# Altium PCB boltanka.PcbDoc
Units mm, origin at the board's own origin, x right, y up, seen from the top; angles counter-clockwise.
Board outline 48 x 25 mm, 2 copper layers (Top Layer, Bottom Layer), stack 1.071 mm thick; 36 components, 23 nets, 116 pads, 0 vias.
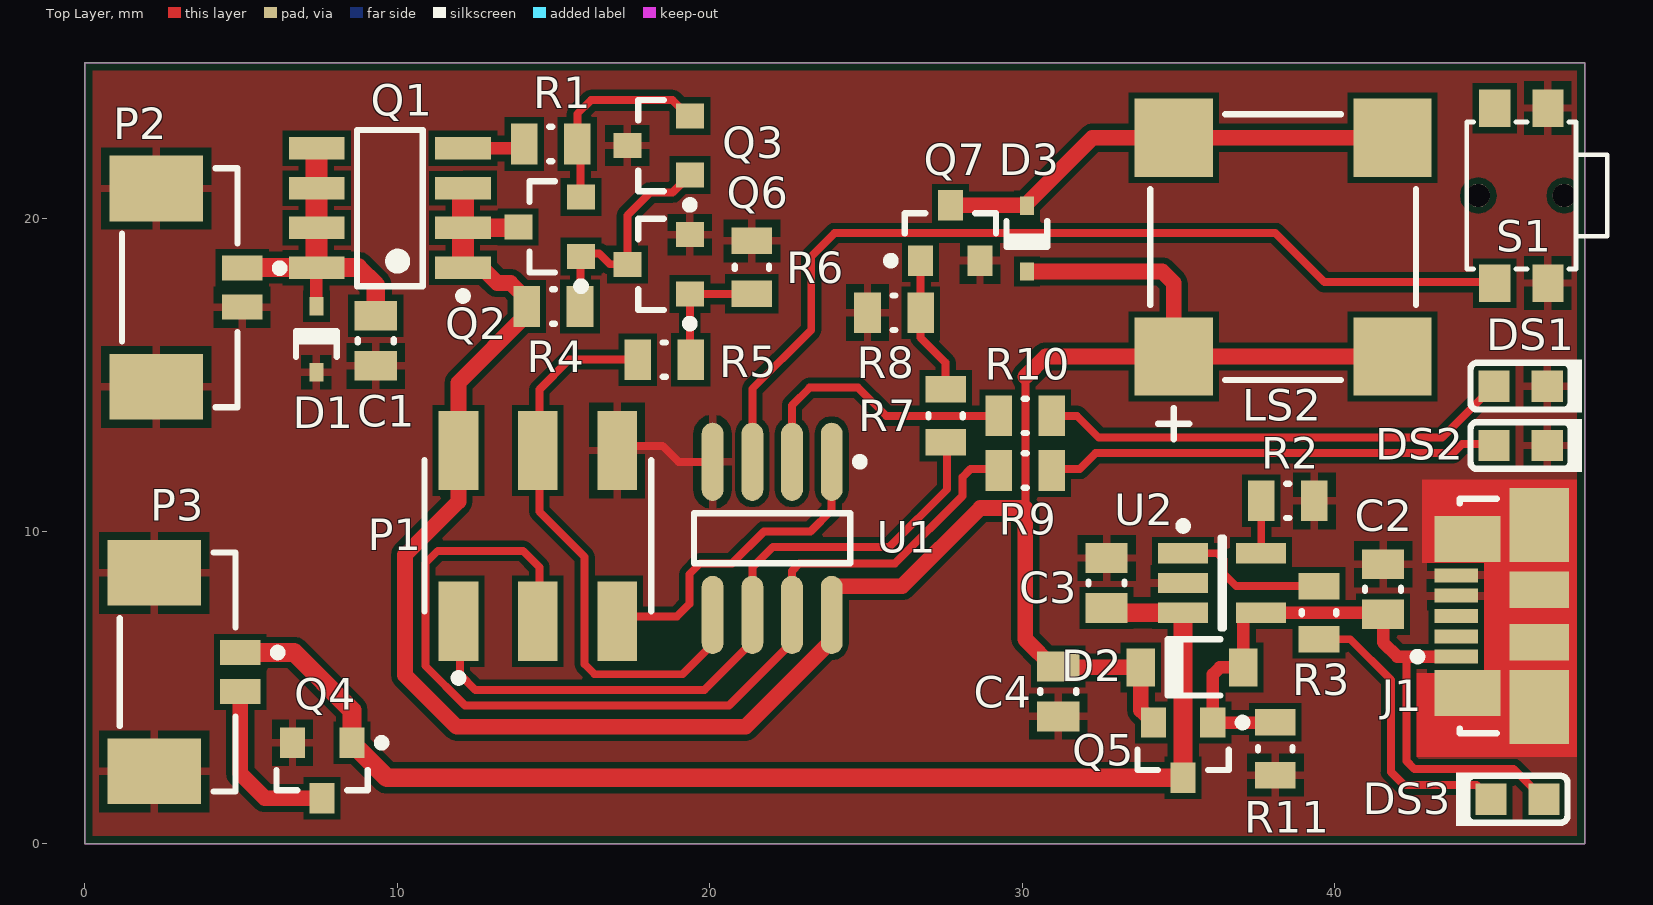
[diagram p0: Top Layer view]
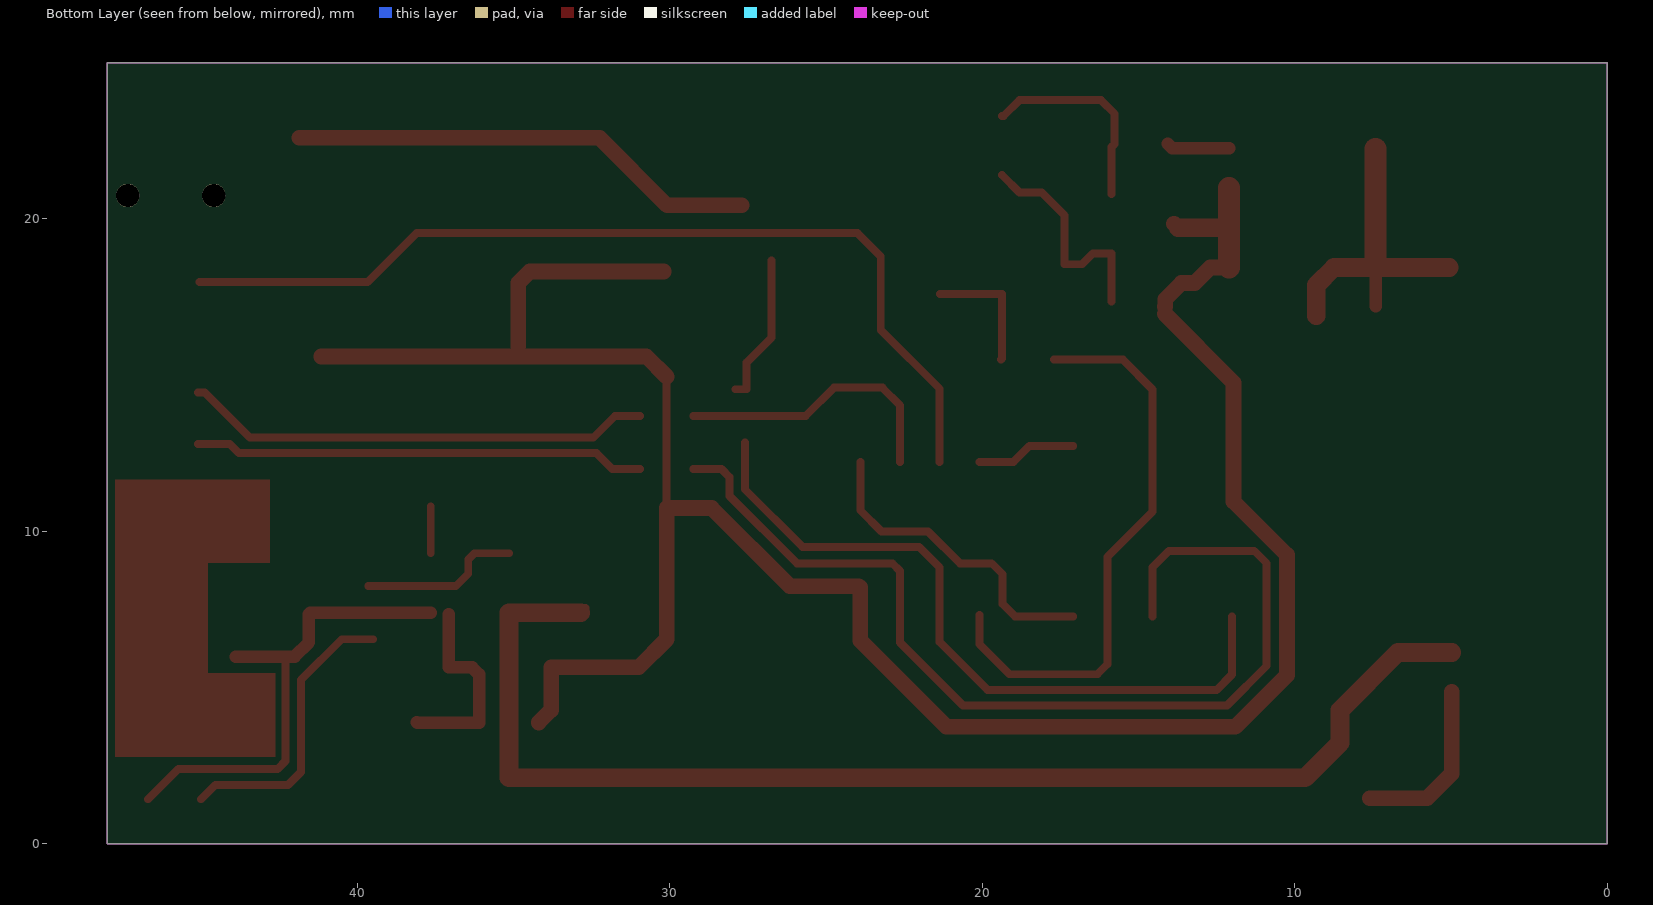
[diagram p1: Bottom Layer view, seen from below]

## Layer stack, top to bottom
Top Solder: solder mask 0.0102, Solder Resist, Dk 3.5
Top Layer: signal copper 0.0356
Dielectric 1: dielectric 1, FR-4, Dk 4.8
Bottom Layer: signal copper 0.0356
Bottom Solder: solder mask 0.0102, Solder Resist, Dk 3.5

## Board outline
0,0 0,25 48,25 48,0

## Design rules (kind name [scope] priority, off if disabled: settings)
Clearance [All] p1: gap=0.2 ignorepadtopadclearanceinfootprint=FALSE
PolygonConnect [All] p1: connectstyle=Relief reliefconductorwidth=0.254 reliefentries=4 polygonreliefangle="90 Angle" airgapwidth=0.254
RoutingVias [All] p1: holewidth=0.711 width=1.27 viastyle="Through Hole" minholewidth=0.711 minwidth=1.27 maxholewidth=0.711 maxwidth=1.27
SolderMaskExpansion [All] p1: expansion=0.102
Width [All] p1: maxlimit=1 minlimit=0.2 preferedwidth=0.3
30 further rules are at their usual default settings.

## Components (designator, comment, footprint, x,y, rotation, side; value= is the part's Value field where it differs from the comment)
C1 "CAP 10uF 6.3V 0805(2012)" CAPC0805(2012)100_L 9.314,16.1 r90 top value=10uF
C2 "CAP 10uF 6.3V 0805(2012)" CAPC0805(2012)100_L 41.55,8.15 r270 top value=10uF
C3 "CAP 10uF 6.3V 0805(2012)" CAPC0805(2012)100_L 32.7,8.35 r270 top value=10uF
C4 "CAP 10uF 6.3V 0805(2012)" CAPC0805(2012)100_L 31.153,4.879 r90 top value=10uF
D1 "BAT42WS-7-F" DIOD-SOD323-2_V 7.414,16.15 r90 top
D2 "MBR0540-TP" MCC-SOD123_V 35.438,5.65 r180 top
D3 "BAT42WS-7-F" DIOD-SOD323-2_V 30.15,19.373 r270 top
DS1 "KP-1608MGC" KING-0603LED_GREEN_V 45.95,14.65 r180 top
DS2 "KP-1608SECK" KING-0603LED_ORANGE_V 45.95,12.75 r180 top
DS3 "KP-1608MGC" KING-0603LED_GREEN_V 45.85,1.429 r0 top
J1 "47346-0001" MOLX-47346-0001-5_V 46.35,7.294 r90 top
LS2 "KSSGJ4B20" KINGS-KSSGJ4B20_V 38.35,19.1 r90 top
P1 "95278-101A06LF" AMPM-95278-101A06LF_V 14.5,9.861 r0 top
P2 "53398-0271" MOLX-53398-0271_V 3.664,17.8 r270 top
P3 "53398-0271" MOLX-53398-0271_V 3.6,5.5 r270 top
Q1 "IRF7404PBF" INF-SOIC-8_V 9.764,20.35 r180 top
Q2 "BC817-25LT1G" ONSC-SOT-23-3-318-08_V 14.883,19.75 r180 top
Q3 "BC807-25LT1G" ONSC-SOT-23-3-318-08_V 18.364,22.35 r180 top
Q4 "IRLML2502TRPBF" INTR-SOT-23-3_V 7.6,2.35 r180 top
Q5 "IRLML6402TRPBF" INTR-SOT-23-3_V 35.15,3 r180 top
Q6 "BC817-25LT1G" ONSC-SOT-23-3-318-08_V 18.364,18.55 r180 top
Q7 "IRLML2502TRPBF" INTR-SOT-23-3_V 27.7,19.55 r0 top
R1 "100R 1% 0805(2012)" RESC0805(2012)_L 14.914,22.4 r180 top value="100.00 Ohm"
R2 "1K5 5% 0805(2012)" RESC0805(2012)_L 38.5,10.977 r0 top value="1500.00 Ohm"
R3 "1K5 5% 0805(2012)" RESC0805(2012)_L 39.5,7.4 r90 top value="1500.00 Ohm"
R4 "1K5 5% 0805(2012)" RESC0805(2012)_L 15,17.2 r180 top value="1500.00 Ohm"
R5 "1K5 5% 0805(2012)" RESC0805(2012)_L 18.55,15.5 r0 top value="1500.00 Ohm"
R6 "100K 5% 0805(2012)" RESC0805(2012)_L 21.35,18.45 r270 top value="100000.00 Ohm"
R7 "1K5 5% 0805(2012)" RESC0805(2012)_L 27.55,13.7 r90 top value="1500.00 Ohm"
R8 "100K 5% 0805(2012)" RESC0805(2012)_L 25.9,17 r0 top value="100000.00 Ohm"
R9 "1K5 5% 0805(2012)" RESC0805(2012)_L 30.1,11.95 r0 top value="1500.00 Ohm"
R10 "1K5 5% 0805(2012)" RESC0805(2012)_L 30.1,13.7 r0 top value="1500.00 Ohm"
R11 "1K5 5% 0805(2012)" RESC0805(2012)_L 38.1,3.05 r90 top value="1500.00 Ohm"
S1 "436331045822" 4363x10458xx 45.975,20.75 r90 top
U1 "ATtiny13V-10SSU" S8S1_M 22,9.779 r270 top
U2 "LTC4054ES5-4.2#PBF" LT-S5-5-TSOT-23_M 36.4,8.35 r0 top

## Footprints (in the part's own frame and the unit in brackets; to place one, negate y for a bottom-side part, rotate by r counter-clockwise, add the part's x,y. Pads: shape width x height; smd on the part's side, far side on the other; paste and mask are expansions set on the pad)
4363x10458xx [mm] "3.5x4.7 mm SMD side push"
  rect 1.2x1 smd: 1(2.8,0.85) 2(2.8,-0.85) 3(-2.8,0.85) 4(-2.8,-0.85)
  round 0.75 hole 0.75 unplated: M1(0,1.375) M2(0,-1.375)
  silkscreen extent -2.35,-2.75 2.35,1.75, body extent -3.2,-2.75 3.2,1.75, height 1.67
AMPM-95278-101A06LF_V [mm] "SMD, 6-Leads, Body 7.26x4.83mm, Pitch 2.54mm"
  rect 1.27x2.54 smd: 1(-2.54,-2.73) 2(-2.54,2.73) 3(0,-2.73) 4(0,2.73) 5(2.54,-2.73) 6(2.54,2.73)
  silkscreen extent -3.63,-4.67 3.63,2.41, body extent -3.61,-3.64 3.61,3.64, height 9.71
CAPC0805(2012)100_L [mm] "Chip Capacitor, Body 2.0x1.2mm, Height 1.0mm, IPC High Density"
  rect 0.95x1.35 smd: 1(-0.8,0) 2(0.8,0)
  silkscreen extent -0.05,-0.58 0.05,0.58, body extent -1.1,-0.72 1.1,0.72, height 1
DIOD-SOD323-2_V [mm] "SOD-323, 2-Leads, Body 1.7x1.3mm, Lead Span 2.5mm"
  rect 0.59x0.45 smd: 1(-1.055,0) 2(1.055,0)
  silkscreen extent -0.56,-0.65 0.26,0.65, body extent -0.85,-0.65 0.85,0.65, height 1.2
INF-SOIC-8_V [mm] "SOIC, 8-Leads, Body 5x4mm, Pitch 1.27mm"
  rect 1.78x0.72 smd: 1(-2.34,1.905) 2(-2.34,0.635) 3(-2.34,-0.635) 4(-2.34,-1.905) 5(2.34,-1.905) 6(2.34,-0.635) 7(2.34,0.635) 8(2.34,1.905)
  silkscreen extent -2.47,-2.5 1.05,2.94, body extent -3,-2.5 3,2.5, height 1.75
INTR-SOT-23-3_V [mm] "SOT23, 3-Leads, Body 2.92x1.3mm, Pitch 1.9mm"
  rect 0.802x0.972 smd: 1(-0.95,-0.885) 2(0.95,-0.885) 3(0,0.885)
  silkscreen extent -2.03,-1.01 1.46,0.64, body extent -1.46,-0.65 1.46,0.65, height 1.12
KING-0603LED_GREEN_V [mm] "SMT LED, 2-Leads, Body 1.6x0.8mm (0603-Size)"
  rect 1x1 smd paste+0 mask+0: 1(0.85,0) 2(-0.85,0)
  silkscreen extent -1.97,-0.85 1.6,0.85, body extent -0.92,-0.53 1.09,0.53, height 1.1
KING-0603LED_ORANGE_V [mm] "SMT LED, 2-Leads, Body 1.6x0.8mm (0603-Size)"
  rect 1x1 smd paste+0 mask+0: 1(0.85,0) 2(-0.85,0)
  silkscreen extent -1.97,-0.85 1.6,0.85, body extent -0.92,-0.53 1.09,0.53, height 1.1
KINGS-KSSGJ4B20_V [mm] "SMD, 4-Leads, Body 8.5x8.5mm"
  rect 2.5x2.5 smd: 1(-3.5,3.5) 2(-3.5,-3.5) 3(3.5,-3.5) 4(3.5,3.5)
  silkscreen extent -6.15,-4.25 4.25,4.25, body extent -4.25,-4.25 4.25,4.25, height 3.2
LT-S5-5-TSOT-23_M [mm] "SOT23, 5-Leads, Body 2.90x1.63mm, Pitch 0.95mm, IPC Low Density"
  rect 1.6x0.65 smd: 1(-1.25,0.95) 2(-1.25,0) 3(-1.25,-0.95) 4(1.25,-0.95) 5(1.25,0.95)
  silkscreen extent -1.37,-1.45 0.05,1.95, body extent -0.87,-1.45 0.87,1.45, height 1
MCC-SOD123_V [mil] "SOD123, 2-Leads, Body 2.7x1.6mm, Height 1.35mm"
  rect 35.98x47.99 smd: 1(-64.5,0) 2(64.5,0)
  silkscreen extent -36,-35 31,35, body extent -53,-31 53,31, height 53
MOLX-47346-0001-5_V [mm] "SMD, 5-Leads, Body 7.5x5mm, Pitch 0.65mm"
  rect 0.45x1.38 smd: 1(-1.3,2.46) 2(-0.65,2.46) 3(0,2.46) 4(0.65,2.46) 5(1.3,2.46)
  rect 1.475x2.1 smd: 6(-2.462,2.1) 7(2.462,2.1)
  rect 2.375x1.9 smd: 8(-2.913,-0.2) 11(2.913,-0.2)
  rect 1.175x1.9 smd: 9(-0.837,-0.2) 10(0.837,-0.2)
  silkscreen extent -3.75,1.16 3.75,3.82, body extent -3.99,-2.78 3.99,2.65, height 2.69
MOLX-53398-0271_V [mm] "Header, 2-Leads, Body 7.65x3.7mm, Pitch 1.25mm"
  rect 0.8x1.3 smd: 1(-0.625,1.375) 2(0.625,1.375)
  rect 2.1x3 smd: MP1(-3.175,-1.375) MP2(3.175,-1.375)
  silkscreen extent -3.83,-2.47 3.83,2.7, body extent -3.82,-2.49 3.83,1.71, height 4.72
ONSC-SOT-23-3-318-08_V [mm] "SOT23, 3-Leads, Body 2.92x1.3mm, Pitch 0.95mm"
  rect 0.9x0.8 smd: 1(-1,0.95) 2(-1,-0.95) 3(1,0)
  silkscreen extent -1.13,-1.46 0.65,2.02, body extent -0.65,-1.46 0.65,1.46, height 1.11
RESC0805(2012)_L [mm] "Chip Resistor, Body 2.0x1.3mm, IPC High Density"
  rect 0.85x1.3 smd: 1(-0.85,0) 2(0.85,0)
  silkscreen extent -0.05,-0.55 0.05,0.55, body extent -1.1,-0.67 1.1,0.68, height 0.7
S8S1_M [mm] "SOIC, 8-Leads, Body 4.9x3.9mm, Pitch 1.27mm, IPC Low Density"
  oval 2.5x0.7 smd: 1(-2.45,1.905) 2(-2.45,0.635) 3(-2.45,-0.635) 4(-2.45,-1.905) 5(2.45,-1.905) 6(2.45,-0.635) 7(2.45,0.635) 8(2.45,1.905)
  silkscreen extent -2.57,-2.5 0.8,2.93, body extent -2,-2.5 2,2.5, height 1.75

## Part data
C1 C2 C3 C4: library part CMP-1036-04917-1, "CAP 10uF 6.3V ±10% 0805 (2012 Metric) Thickness 1mm SMD", Case-EIA=0805, Case-Metric=2012, Rated Voltage="6.3 V", Tolerance=A±10%, Max Thickness="1 mm", Technology=SMT
D1 D3: library part CMP-2000-05925-1, "Schottky Barrier Diode, 30 V, -55 to 125 degC, 2-Pin SOD323, RoHS, Tape and Reel", If - Forward Current=0.1A, Ifsm - Forward Surge Current=4A, Ir - Reverse Current=0.5uAat25V, Manufacturer=DiodesIncorporated, Maximum Operating Temperature=+125C, Minimum Operating Temperature=-55C, Operating Temperature Range=-55Cto+125C, Package / Case=SOD-323, Package Description="2-Pin Surface Mount Device, Body 1.7 x 1.3 mm", Package Reference=SOD323-2, Pd - Power Dissipation=200mW, Vf - Forward Voltage=1Vat0.2A, Vrrm - Repetitive Reverse Voltage=30V, Brand=DiodesIncorporated, Configuration=Single, Datasheet URL=http://www.diodes.com/_files/datasheets/ds30100.pdf, Datasheet Version="Rev. 14-2, 06/2012", Factory Pack Quantity=3000, Height=1mm, Length=1.8mm, Manufacturer URL=http://www.diodes.com/, Mounting Style=SMD/SMT, Mounting Technology=SurfaceMount, Package URL=http://www.vishay.com/docs/71192/71192.pdf, Packaging=Reel, Product=SchottkyDiodes, Product Category=SchottkyDiodes&Rectifiers, RoHS=True, Series=BAT42, Technology=Si, Termination Style=SMD/SMT, trr - Reverse Recovery time=5ns, Type=SurfaceMountSchottkyBarrierDiode, Unit Weight=0.000173oz, Width=1.4mm
D2: library part CMP-2000-06672-1, "Schottky Rectifier, 0.5 A, 40 V, -55 to 150 degC, 2-Pin SOD123, Pb-Free, Tape and Reel", Average Rectified Current-Max=0.5A, Forward Voltage=0.55V, Manufacturer="Micro Commercial Components", Package Description="2-Pin Small Outline Diode, Body 2.7 x 1.6 mm, Height 1.35 mm", Package Reference=SOD123, Peak Current-Max=5.5A, Reverse Current-Max=0.2mA, Reverse Voltage-Max [Vrrm]=40V, Datasheet URL=http://www.mccsemi.com/up_pdf/MBR0520~MBR0580(SOD123).pdf, Datasheet Version="Rev. C, 09/2014", Manufacturer URL=http://www.mccsemi.com/, Mounting Technology=SurfaceMount, Package URL=http://www.mccsemi.com/up_pdf/1N4448W(SOD-123).pdf
DS1 DS3: library part CMP-0404-00001-1, "LED, SMT, 0603(1608), 1.1mm thickness, Green", Forward Current="30 mA", Manufacturer=Kingbright, Power Dissipation="75 mW", Reverse Voltage="5 V", Storage Temperature="-40 to +85 degC", ComponentLink1Description="Manufacturer URL", ComponentLink1URL=http://www.kingbright.com/, Mounting Technology="Surface Mount", PackageDescription="2-Pin SMT LED, 1.6 x 0.8 mm Pitch", PackageReference=0603LED_GREEN, Packing Type="2000 pcs / reel", PartNumber=KP-1608MGC
DS2: library part CMP-0404-00002-1, "LED, SMT, 0603(1608), 1.1mm thickness, Orange", Forward Current="30 mA", Manufacturer=Kingbright, Power Dissipation="75 mW", Reverse Voltage="5 V", Storage Temperature="-40 to +85 degC", ComponentLink1Description="Manufacturer URL", ComponentLink1URL=http://www.kingbright.com/, ComponentLink2Description=Datasheet, ComponentLink2URL=http://www.kingbright.com/manager/upload/pdf/(1366274642)KP-1608SECK(Ver.14A).pdf, Mounting Technology="Surface Mount", PackageDescription="2-Pin SMT LED, 1.6 x 0.8 mm Pitch", PackageReference=0603LED_ORANGE, Packing Type="2000 pcs / reel", PartNumber=KP-1608SECK
J1: library part CMP-2000-05246-1, "Micro-USB B Receptacle with Flange, -30 to 85 degC, 5-Pin SMD, RoHS, Tape and Reel", Color=Black, Manufacturer=Molex, Maximum Current Rating=1.8/ContactA, Maximum Voltage Rating=30VAC, Operating Temperature=-30to85C, Body Orientation=RightAngle, Contact Material=CopperAlloy, Contact Plating=GoldOverPalladiumNickelOverNickel, Datasheet URL=https://datasheet.ciiva.com/30075/304740473460001-io-nectors-30075527.pdf, Datasheet Version=Dec-13, Dimension=7.8x5.43x2.94mm, Gender=RCP, Housing Material=LiquidCrystalPolymer, Manufacturer URL=http://www.molex.com/, Mounting=SurfaceMount, Number of Contacts=5, Number of Ports=1, Number of Terminals=5, Packaging=EmbossedTapeandReel, Part No=47346-0001, Pitch=0.65mm, RoHS=Yes, Termination Method=Solder, Type=MicroUSBTypeB
LS2: library part CMP-2000-06519-1, "Electromagnetic Buzzer, 3 to 5 V, 80 mA, 2.73 kHz, -30 to 70 degC, 4-Pin SMD, RoHS, Tape and Reel", Manufacturer=KingstateElectronicsCorp., Maximum Resonant Frequency=2730(Typ)Hz, Maximum Supply Current=80mA, Operating Temperature=-30to70°C, Package Description="4-Pin Surface Mount Device, Body 8.5 x 8.5 mm", Typical Operating Supply Voltage=3.6Vo-p, Category=AudioIndicatorsandAlerts, Datasheet URL=http://datasheet.octopart.com/KSSGJ4B20-Kingstate-datasheet-5458884.pdf, Datasheet Version="Rev. 1.2, 04/2005", Manufacturer URL=http://www.kingstate.com.tw/index.php/en/, Minimum Sound Pressure=90dBA, Mounting=SurfaceMount, Mounting Technology=SurfaceMount, Package Reference=KSSGJ4B20, Product Depth=8.5mm, Product Height=3.2mm, Product Length=8.5mm, Technology=Magnetic, Termination Method=SolderPad, Type=Transducer
P1: library part CMP-1743-00002-1, "Male Header, Pitch 2.54 mm, 2 x 3 Position, Height 14.4 mm, RoHS, Tape and Reel", Case\Package=0603, Case Code (Metric)=1608, Max Operating Temperature="155 degC", Min Operating Temperature="-55 degC", Power Rating="100 mW", Resistance="49.9 Ohm", Tolerance=1%, Voltage Rating="50 V", Case Code (Imperial)=0603, ComponentLink1Description=Datasheet, ComponentLink1URL=http://portal.fciconnect.com/Comergent//fci/drawing/95278.pdf, DatasheetVersion="Rev. AC, 03/2016", Height="0.45 mm", Length="1.6 mm", Mount="Surface Mount", PackageDescription="Male Header, Pitch 2.54 mm, 2 x 3 Position, Height 14.4 mm", PackageReference=95278-101A06LF, Packaging="Tape and Reel", REACH SVHC="No SVHC", RoHSCompliant=true, Width="0.8 mm"
P2 P3: library part CMP-2000-07600-1, "Male Header, Pitch 1.25 mm, 1 x 2 Position, Height 4.7 mm, -40 to 85 degC, RoHS, Tape and Reel", Colour=Natural, Contact Resistance=20mOhm, Current Rating=1A, Flammability Rating=UL94V-0, Insulation Resistance=100MOhm, Manufacturer=Molex, Max Operating Temperature=85degC, Min Operating Temperature=-40degC, Package Description="Male Header, Pitch 1.25 mm, 1 x 2 Position, Height 4.7 mm", Package Quantity=1000, Voltage Rating=125V, Contact Material=Tin, Contact Plating=Tin, Datasheet URL=http://www.molex.com/pdm_docs/sd/533980271_sd.pdf, Datasheet Version="Rev. J, 09/2015", Gender=Male, Glow Wire Compliant=Non-compliant, Housing Colour=Natural, Housing Material=Nylon, Lead Free=LeadFree, Manufacturer URL=http://www.molex.com/, Mount=SurfaceMount, Mounting Technology=SurfaceMount, Number of Circuits=2, Number of Contacts=2, Number of Positions=2, Number of Rows=1, Orientation=Vertical, Package Reference=53398-0271, Packaging=TapeandReel, Pitch=1.25mm, Radiation Hardening=No, REACH SVHC=Unknown, RoHSCompliant=True, Termination=Solder, Voltage Rating (AC)=125V, Voltage Rating (DC)=125V, Working Voltage=125V
Q1: library part CMP-2000-06465-1, "HEXFET(R) Power MOSFET, 6.7 A, 20 V, 8-Pin SOIC, RoHS, Tape and Reel", Current - Continuous Drain (Id) @ 25°C=6.7A(Ta), Drain to Source Voltage (Vdss)=20V, Input Capacitance (Ciss) @ Vds=1500pF@15V, Manufacturer=InfineonTechnologies, Operating Temperature=-55°C~150°C(TJ), Package / Case="8-SOIC(0.154\",3.90mmWidth)", Package Description="8-Pin Small Outline Integrated Circuit, Body 4.9 x 3.9 mm, Pitch 1.27 mm", Package Reference=SOIC-8, Power - Max=2.5W, Supplier Device Package=8-SO, Category=DiscreteSemiconductorProducts, Datasheet URL=http://www.infineon.com/dgdl/irf7404pbf.pdf?fileId=5546d462533600a4015355fa31be1ba0, Datasheet Version=09/2004, Family=Transistors-FETs,MOSFETs-Single, FET Feature=Standard, FET Type=MOSFETP-Channel,MetalOxide, Gate Charge (Qg) @ Vgs=50nC@4.5V, Manufacturer URL=http://www.infineon.com/, Mounting Technology=SurfaceMount, Mounting Type=SurfaceMount, Packaging=Tube, Part Status=NotForNewDesigns, Rds On (Max) @ Id, Vgs=40mOhm@3.2A,4.5V, Series=HEXFET®, Vgs(th) (Max) @ Id=700mV@250µA
Q2 Q6: library part CMP-1048-00737-1, "General Purpose Transistor, NPN Silicon, 3-Pin SOT-23, Pb-Free, Tape and Reel", Manufacturer="On Semiconductor", ComponentLink1Description="Manufacturer URL", ComponentLink1URL=http://www.onsemi.com/, ComponentLink2Description=Datasheet, ComponentLink2URL=http://www.onsemi.com/pub_link/Collateral/BC817-16LT1-D.PDF, ComponentLink3Description="Package Specification", ComponentLink3URL=http://www.onsemi.cn/pub_link/Collateral/318-08.PDF, DatasheetVersion="Rev. 12", fT Min (MHz)=100, IC Continuous (A)=0.5, Mounting Technology="Surface Mount", PackageDescription="3-Pin Small Outline Transistor, Body 2.92 x 1.3 mm, Pitch 0.95 mm", PackageReference=SOT-23-3-318-08, PackageVersion="Rev. AP, 11/2009", Packing="Tape and Reel", PartNumber=BC817-25LT1G, Polarity=NPN, RoHS=TRUE
Q3: library part CMP-1048-00691-1, "General Purpose Transistor, PNP Silicon, 3-Pin SOT-23, Pb-Free, Tape and Reel", Manufacturer="On Semiconductor", ComponentLink1Description="Manufacturer URL", ComponentLink1URL=http://www.onsemi.com/, ComponentLink2Description=Datasheet, ComponentLink2URL=http://www.onsemi.com/pub_link/Collateral/BC807-16LT1-D.PDF, ComponentLink3Description="Package Specification", ComponentLink3URL=http://www.onsemi.cn/pub_link/Collateral/318-08.PDF, DatasheetVersion="Rev. 10", fT Min (MHz)=100, IC Continuous (A)=-0.5, Mounting Technology="Surface Mount", PackageDescription="3-Pin Small Outline Transistor, Body 2.92 x 1.3 mm, Pitch 0.95 mm", PackageReference=SOT-23-3-318-08, PackageVersion="Rev. AP, 11/2009", Packing="Tape and Reel", PartNumber=BC807-25LT1G, Polarity=PNP, RoHS=TRUE
Q4 Q7: library part CMP-2000-04985-1, "N-Channel HEXFET(R) Power MOSFET, 20 V VDS, +/- 12 V VGS, 4.2 A, 3-Pin SOT23, RoHS, Tape and Reel", Drain-Source On Resistance-Max=0.045O, Drain-to-Source Voltage [Vdss]=20V, Manufacturer="International Rectifier", Package Description="3-Pin Small Outline Transistor, Body 2.92 x 1.3 mm, Pitch 0.95 mm", Package Reference=SOT-23-3, Rated Power Dissipation=1.25W, Channel Type=N-Channel, Datasheet URL=https://datasheet.ciiva.com/6383/irlml2502pbf-6383216.pdf, Datasheet Version=Apr-14, Manufacturer URL=http://internationalrectifier.com/, Qg Gate Charge=8nC
Q5: library part CMP-2000-04987-1, "HEXFET(R) Power P-Channel MOSFET, -20 V, -3.7 A, -55 to 150 degC, 3-Pin SOT-23, RoHS, Tape and Reel", Drain-Source On Resistance-Max=0.065O, Drain-to-Source Voltage [Vdss]=20V, Manufacturer="International Rectifier", Package Description="3-Pin Small Outline Transistor, Body 2.92 x 1.3 mm, Pitch 0.95 mm", Package Reference=SOT-23-3, Rated Power Dissipation=1.3W, Channel Type=P-Channel, Datasheet URL=http://datasheet.octopart.com/IRLML6402TRPBF-International-Rectifier-datasheet-93882.pdf, Datasheet Version=Feb-05, Manufacturer URL=http://internationalrectifier.com/, Qg Gate Charge=8nC
R1: library part CMP-1013-00397-1, "100R 0.125W 1% 0805 (2012 Metric)  SMD", Case-EIA=0805, Case-Metric=2012, Power="0.125 W", Tolerance="1 %", Technology=SMT
R2 R3 R4 R5 R7 R9 R10 R11: library part CMP-1013-00078-1, "1K5 0.125W 5% 0805 (2012 Metric)  SMD", Case-EIA=0805, Case-Metric=2012, Power="0.125 W", Tolerance="5 %", Technology=SMT
R6 R8: library part CMP-1013-00122-1, "100K 0.125W 5% 0805 (2012 Metric)  SMD", Case-EIA=0805, Case-Metric=2012, Power="0.125 W", Tolerance="5 %", Technology=SMT
S1: "WS-TASU 3.5x4.7 mm SMD side push, boss design", ComponentLink1Description=Manufacturer, ComponentLink1URL=http://www.we-online.de, ComponentLink2Description=Datasheet, ComponentLink2URL=http://katalog.we-online.de/em/datasheet/4363x10458xx.pdf, Life Cycle="100000 cycles", Operation Force=220g, Part Number=436331045822, Published Date="June 2017", Publisher="Wurth Elektronik", Size=4.7x3.5mm
U1: library part CMP-0093-00147-2, "8-bit AVR Microcontroller, 1.8-5.5V, 1KB Flash, 64 Bytes EEPROM, 64 Bytes SRAM, 8-pin SOIC, Industrial Grade (-40°C to 85°C), Pb-Free", Code_IPC=SOIC127P600-8, Code_JEDEC=MS-012, ComponentLink1Description="Manufacturer URL", ComponentLink1URL=http://www.atmel.com/, ComponentLink2Description="ATtiny13  Datasheet", ComponentLink2URL=http://www.atmel.com/dyn/resources/prod_documents/doc2535.pdf, ComponentLink3Description="ATtiny13 Summary", ComponentLink3URL=http://www.atmel.com/dyn/resources/prod_documents/2535S.pdf, DatasheetVersion="revJ, Aug-2010", PackageDescription="8-Lead (0.150\" Wide Body), Plastic Gull Wing Small Outline (JEDEC SOIC)", PackageReference=S8S1, PackageVersion="revA, Oct-2001", RevisionNote="DatasheetVersion updated. Removed ComponentAvailability note. URLs added."
U2: library part CMP-0471-00451-1, "Standalone Linear Li-Ion Battery Charger with Thermal Regulation, 4.25 to 6.5 V Vin, 5-pin SOT23 (S5-5), -40 to 85 degC, Pb-Free", Float Voltage="4.2 V", Manufacturer="Linear Technology", Max Charge Current(A)=0.8, Battery Chemistry="Li-Ion, Li-Polymer", Charge Termination=C/10, Code_JEDEC=MO-193, ComponentLink1Description="Manufacturer URL", ComponentLink1URL=http://www.linear.com/, ComponentLink2Description=Datasheet, ComponentLink2URL=http://cds.linear.com/docs/en/datasheet/405442xf.pdf, ComponentLink3Description="Package Specification", ComponentLink3URL=http://cds.linear.com/docs/en/packaging/SOT_5_05-08-1635.pdf, Mounting Technology="Surface Mount", Number of Cells=1, PackageDescription="5-Pin Plastic TSOT-23, Body 1.63 x 2.90 mm, Pitch 0.95 mm", PackageReference=S5-5, PackageVersion=Jun-10, PartNumber=LTC4054ES5-4.2#PBF, RoHS=TRUE, Type of Charger=Linear, Vin Max(V)=6.5, Vin Min(V)=4.25

## Nets (pads, with @x,y where several pads share a name; then routed paths per layer and width w, separated by ;. In a path a pad name is that pad's centre, name@x,y a point inside that pad or via, vN(x,y) a via of type N, cw(c..) or ccw(c..) an arc to the next point about the centre after c; other vN are vias at no path point)
BUTT: S1.3 U1.3 | length 30.1
  Top Layer w0.254: U1.3 21.365,14.565 23.25,16.45 23.25,18.8 24,19.55 38.1,19.55 39.674,17.976 S1.3@45.05,17.976
GND: C1.1 C2.1 C3.1 C4.1 D1.1 DS1.2 DS2.2 J1.4 J1.5 J1.6 J1.7 J1.8 J1.9 J1.10 J1.11 P1.6 P2.2 P2.MP1 P2.MP2 P3.MP1 P3.MP2 Q3.3 Q4.2 Q6.2 Q7.2 R2.2 R6.1 R8.1 R11.1 S1.2 S1.4 U1.4 U2.2 | length 3.3
  Top Layer w0.254: P1.6@17.09,12.739 18.49,12.739 19,12.229 U1.4
  Top Layer w0.8: J1.8@46.487,4.388 J1.8@46.55,4.45
LED2: R10.1 U1.2 | length 9
  Top Layer w0.254: U1.2 22.635,14.035 23.2,14.6 24.75,14.6 25.65,13.7 R10.1
MISO: P1.1 R7.1 U1.6 | length 23.2
  Top Layer w0.254: P1.1@12.01,7.279 12.01,5.419 12.5,4.929 19.829,4.929 21.365,6.465 U1.6 21.365,8.844 22.021,9.5 25.75,9.5 27.6,11.35 R7.1@27.6,12.85
MOSI: P1.4 R5.1 U1.5 | length 18.5
  Top Layer w0.254: R5.1 15.504,15.5 14.55,14.546 14.55,10.631 16,9.181 16,5.75 16.321,5.429 19.129,5.429 20.095,6.395 U1.5
NetC1_2: C1.2 D1.2 P2.1 Q1.5 Q1.6 Q1.7 Q1.8 | length 10.5
  Top Layer w0.4: P2.1 P2.1@5.059,18.445 ; D1.2 7.414,18.445 Q1.8 ; Q1.5@7.414,22.245 Q1.5
  Top Layer w0.6: P2.1@5.059,18.445 Q1.8@7.414,18.445 ; Q1.8 8.744,18.445 9.314,17.875 C1.2
  Top Layer w0.7: Q1.8@7.414,18.445 Q1.5@7.414,22.245
NetD3_1: D3.1 LS2.3 LS2.4 Q7.3 | length 15
  Top Layer w0.5: Q7.3 30.087,20.435 32.252,22.6 LS2.4 LS2.3
NetDS1_1: DS1.1 R10.2 | length 15
  Top Layer w0.254: R10.2 31.75,13.7 32.45,13 43.433,13 44.883,14.45 DS1.1@45.1,14.45
NetDS2_1: DS2.1 R9.2 | length 14.5
  Top Layer w0.254: R9.2@30.95,12 31.843,12 32.346,12.504 43.787,12.504 44.083,12.8 DS2.1@45.1,12.8
NetDS3_2: DS3.2 R3.1 | length 9.3
  Top Layer w0.25: 41.8,2.3 41.8,5.25
  Top Layer w0.254: R3.1 40.5,6.55 41.8,5.25 ; 41.8,2.3 42.216,1.884 44.545,1.884 DS3.2
NetP3_2: P3.2 Q4.3 | length 5.6
  Top Layer w0.5: P3.2 4.975,2.25 5.76,1.465 Q4.3
NetQ1_4: Q1.4 R1.2 | length 2
  Top Layer w0.254: R1.2@14.059,22.405 R1.2
  Top Layer w0.4: Q1.4 13.919,22.255 R1.2
NetQ2_1: Q2.1 Q3.1 Q6.3 R4.1 | length 7.3
  Top Layer w0.254: R4.1@15.864,17.365 15.864,18.9 16.459,18.9 16.809,18.55 Q6.3 17.364,20.114 18.098,20.848 18.812,20.848 Q3.1
NetQ2_2: Q2.2 Q3.2 R1.1 | length 6.6
  Top Layer w0.254: Q2.2@15.864,20.8 15.864,22.3 R1.1 15.764,23.364 16.2,23.8 18.814,23.8 19.314,23.3 Q3.2
NetQ6_1: Q6.1 R5.2 R6.2 | length 4.1
  Top Layer w0.254: R5.2 19.364,15.536 Q6.1 R6.2
NetQ7_1: Q7.1 R7.2 R8.2 | length 4.7
  Top Layer w0.254: Q7.1 R8.2 26.75,16.2 27.55,15.4 R7.2 ; R7.2@27.6,14.55 R7.2@27.9,14.55
NetR2_1: R2.1 U2.5 | length 1.5
  Top Layer w0.25: U2.5 R2.1@37.65,10.8
NetR3_2: R3.2 U2.1 | length 5.2
  Top Layer w0.25: U2.1 36.25,9.3 36.45,9.1 36.45,8.65 36.85,8.25 R3.2@39.65,8.25
RST: P1.5 U1.1 | length 10.3
  Top Layer w0.254: P1.5@17.09,7.279 18.95,7.279 19.35,7.679 19.35,8.629 19.7,8.979 20.714,8.979 21.735,10 23.226,10 23.905,10.679 U1.1
SCK: P1.3 R9.1 U1.7 | length 32.6
  Top Layer w0.254: P1.3@14.55,7.279 14.55,8.854 14.025,9.379 11.3,9.379 10.9,8.979 10.9,5.701 12.172,4.429 20.618,4.429 22.635,6.446 U1.7 22.635,8.735 22.879,8.979 25.929,8.979 28.087,11.137 28.087,11.737 28.35,12 R9.1@29.25,12
VBAT: C3.2 P3.1 Q4.1 Q5.3 U2.3 | length 40.2
  Top Layer w0.254: C3.2 C3.2@32.85,7.4
  Top Layer w0.6: P3.1 6.699,6.125 8.55,4.274 Q4.1 9.67,2.115 Q5.3 U2.3 C3.2@32.85,7.4
VCC: C2.2 D2.1 DS3.1 J1.1 Q5.1 R11.2 U2.4 | length 21.7
  Top Layer w0.254: 42.3,5.817 42.3,2.65 42.55,2.4 45.729,2.4 DS3.1
  Top Layer w0.4: U2.4@37.077,7.35 D2.1 36.327,5.65 36.1,5.423 Q5.1 38.085,3.885 R11.2 ; U2.4 41.5,7.4 C2.2 41.55,6.45 42.006,5.994 J1.1
VPP: C4.2 D2.2 D3.2 LS2.1 LS2.2 P1.2 Q1.1 Q1.2 Q1.3 Q2.3 Q5.2 R4.2 U1.8 | length 77.8
  Top Layer w0.254: Q2.3@13.849,19.865 Q2.3@13.864,19.85 ; R4.2@14.164,16.964 R4.2@14.164,17.2 ; 30.1,10.75 30.1,14.949 ; LS2.1 LS2.1@34.85,15.924
  Top Layer w0.5: Q1.1 12.705,18.445 13.2,17.95 13.625,17.95 14.15,17.425 R4.2 R4.2@14.164,17.2 ; Q2.3@13.729,19.715 Q2.3@13.864,19.85 ; R4.2@14.164,16.964 11.96,14.76 P1.2 11.96,10.958 10.25,9.248 10.25,5.4 11.9,3.75 21.15,3.75 23.905,6.505 U1.8 23.905,8.205 23.95,8.25 26.163,8.25 28.663,10.75 30.1,10.75 30.1,6.55 31,5.65 D2.2 33.8,4.285 Q5.2 ; 30.1,14.949 30.751,15.6 LS2.1 LS2.2@41.15,15.6 ; D3.2@30.2,18.318 34.482,18.318 34.85,17.95 LS2.1@34.85,15.924
  Top Layer w0.6: Q1.2 Q2.3@13.729,19.715
  Top Layer w0.7: Q1.1 Q1.2 Q1.3
pads on no net: J1.2 J1.3 S1.1 S1.M1 S1.M2

## Polygon pours and split planes (outlines as drawn)
GND on Top Layer "Top Layer-GND" (solid, remove dead copper, pour order 0): 0,25 48,25 48,0 0,0

## Keep-outs
Keep-Out Layer:
  the board outline again, w0.05

## Other copper
Top Layer:
  region net GND: 42.8,9 44.78,9 44.78,5.464 42.633,5.464 42.633,2.788 47.745,2.788 47.745,11.35 47.745,11.648 42.8,11.648

## Text inside footprints (layer, text, board x,y; h text height)
J1: Mechanical 6 "PCB EDGE" at 48.107,0.094 h0.3 r90